# EAGLE board WaterLevel-Eagle-V1 (EAGLE 9.6.2)
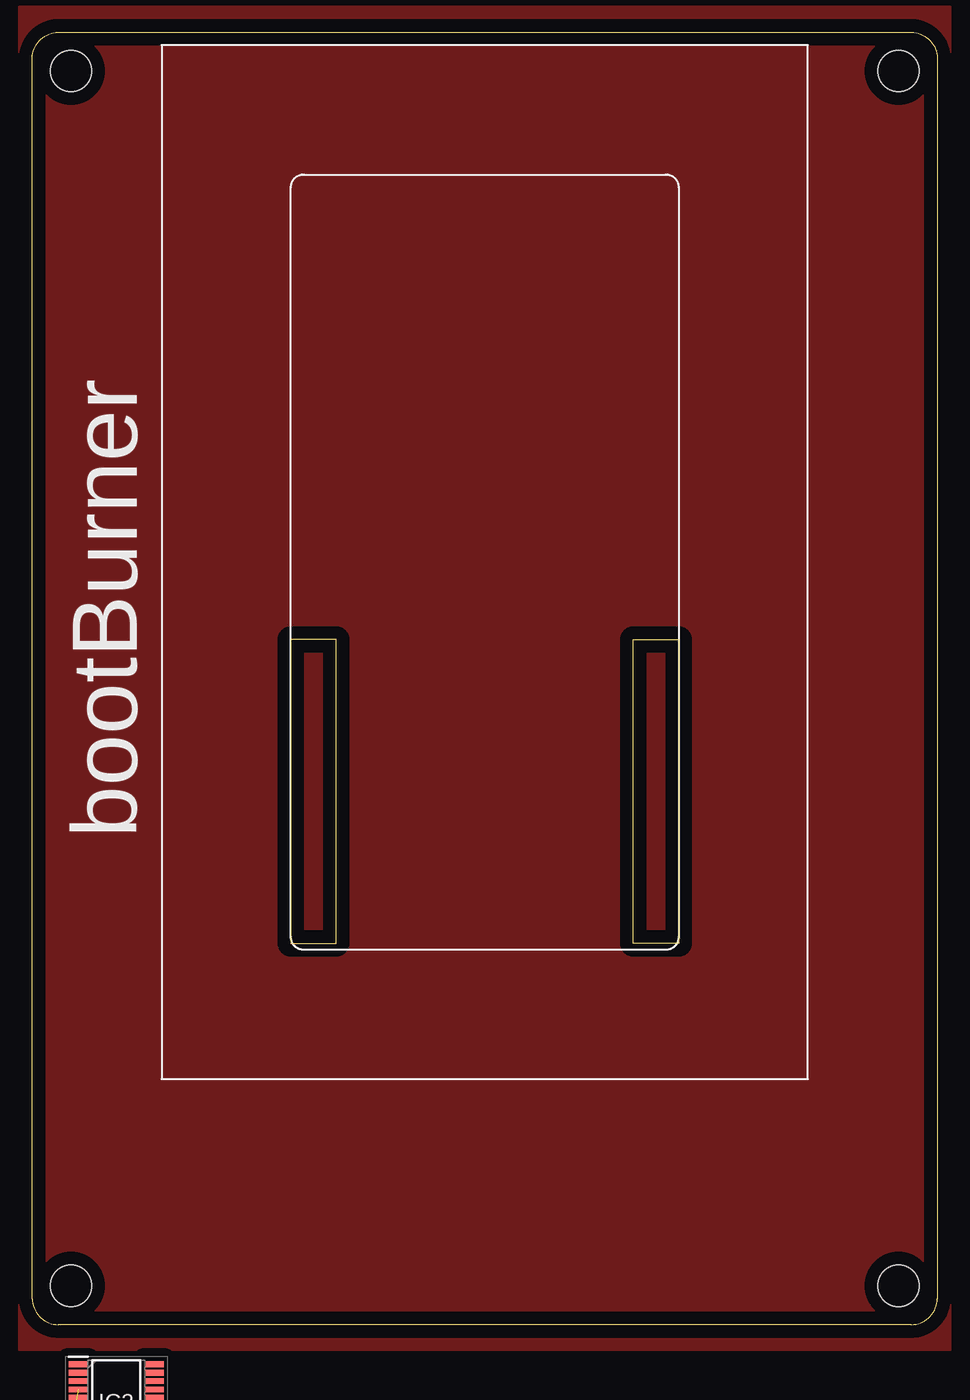
[diagram p0: board, top side]
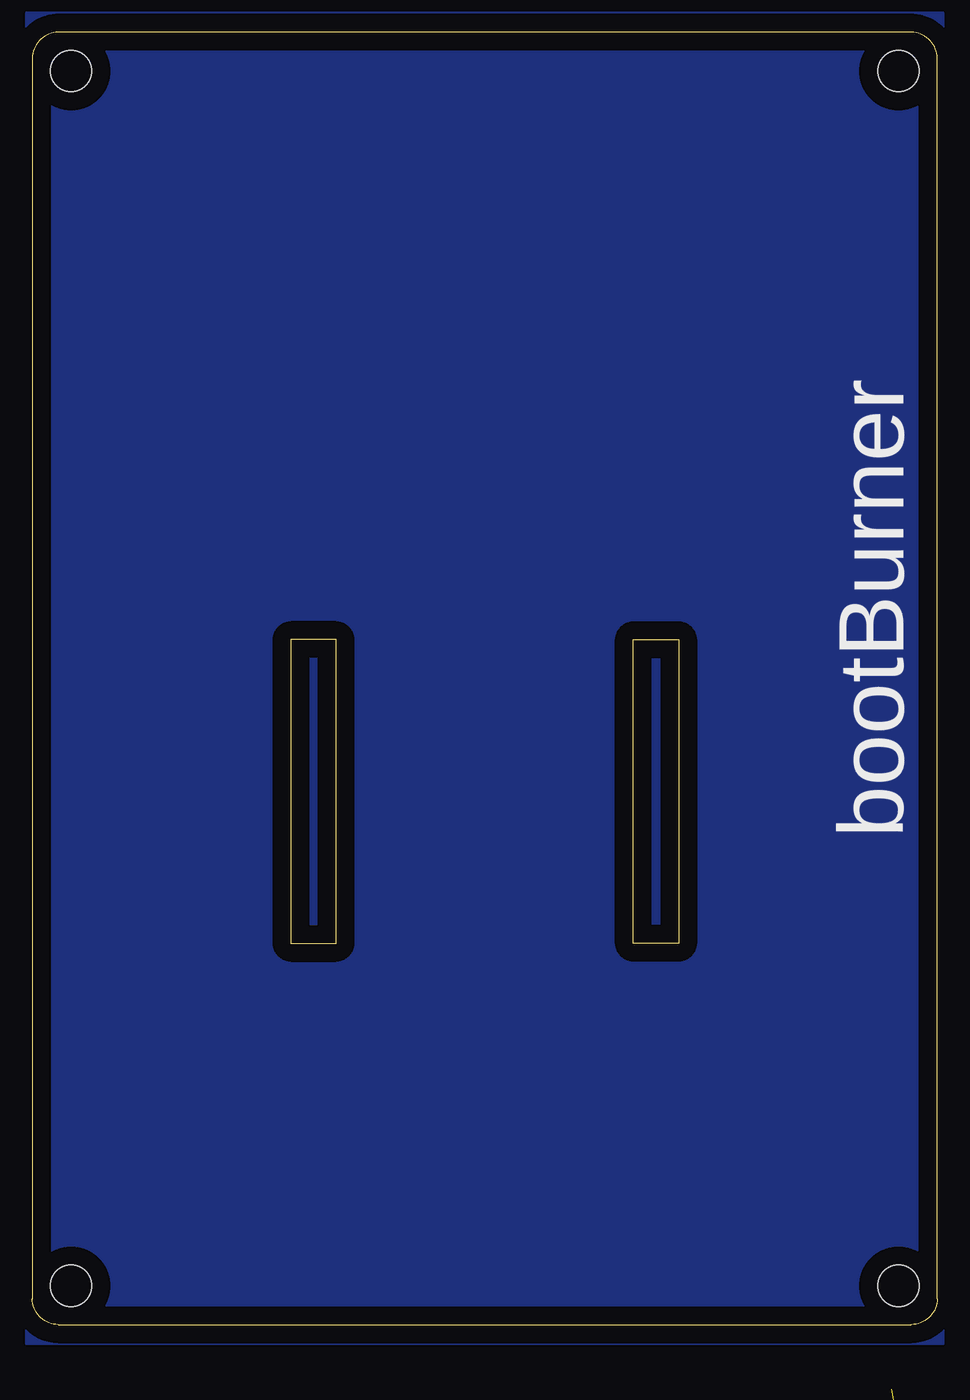
[diagram p1: board, bottom side, seen from below]

Size 70 x 100 mm. Coordinates in mm from the lower left corner, seen from the top.
Outline: 23.5,29.5 23.5,53 20,53 20,29.5 23.5,29.5
Outline: 46.5,29.5 46.5,53 50,53 50,29.5 46.5,29.5
Outline: 0,2 0,98 arc-90 2,100 68,100 arc-90 70,98 70,2 arc-90 68,0 2,0 arc-90 0,2
Copper layers (1*16): Top 0.035mm / dielectric 1.5mm / Bottom 0.035mm
Design rules "default": minimum track width 6mil, minimum drill 0.35mm, track to track 6mil, track to pad 6mil, pad to pad 6mil, via to via 6mil, smd to smd 6mil, copper to edge 40mil, drill to drill 6mil, minimum pad ring 10mil, minimum via ring 8mil, stop-mask expansion 4mil, vias tented up to drill 0mil, thermal gap 10mil
Holes 3.2 mm at 67,97 3,97 3,3 67,3

## Footprints (pad centres in the part's own frame; a part is rotated, then mirrored left to right if it is on the bottom)
C0805 = smd 1.3 x 1.5: 1 -0.95,0; 2 0.95,0
SOP65P640X120-20N = smd 1.475 x 0.45: 1 -2.938,2.925; 2 -2.938,2.275; 3 -2.938,1.625; 4 -2.938,0.975; 5 -2.938,0.325; 6 -2.938,-0.325; 7 -2.938,-0.975; 8 -2.938,-1.625; 9 -2.938,-2.275; 10 -2.938,-2.925; 11 2.938,-2.925; 12 2.938,-2.275; 13 2.938,-1.625; 14 2.938,-0.975; 15 2.938,-0.325; 16 2.938,0.325; 17 2.938,0.975; 18 2.938,1.625; 19 2.938,2.275; 20 2.938,2.925
R0805 = smd 1.3 x 1.5: 1 -0.95,0; 2 0.95,0

## Placement (x,y rotation side)
C7  1uF  [C0805]  1,-11 0 top  (outside the outline)
C8  0.1uF  [C0805]  7,-11 0 top  (outside the outline)
IC2  STM8S003F3P6  [SOP65P640X120-20N]  6.5,-6 0 top  (outside the outline)
R4  10K  [R0805]  1,-13.5 0 top  (outside the outline)

## Library data of the parts
C7 C8 R4 = eventHorizon
IC2 = electroShri; ARROW_PART_NUMBER: STM8S003F3P6; ARROW_PRICE-STOCK: https://www.arrow.com/en/products/stm8s003f3p6/stmicroelectronics; DESCRIPTION: STMICROELECTRONICS - STM8S003F3P6 - MCU, 8BIT, STM8, 16MHZ, TSSOP-20; HEIGHT: 1.2mm; MANUFACTURER_NAME: STMicroelectronics; MANUFACTURER_PART_NUMBER: STM8S003F3P6; MOUSER_PART_NUMBER: 511-STM8S003F3P6; MOUSER_PRICE-STOCK: https://www.mouser.co.uk/ProductDetail/STMicroelectronics/STM8S003F3P6?qs=vV0pr1uq7fD%252BGii5YhjnYw%3D%3D

## Nets
D13: IC2.1
GND: C7.2 C8.2 IC2.7
PA1/D0: IC2.5
PA2/D1: IC2.6
PA3/SS/D2~: IC2.10
PC3/D5~: IC2.13
PC4/D6~/A0: IC2.14
PC5/D7: IC2.15
PC6/D8~: IC2.16
PC7/D9~: IC2.17
PD2/D11/A1: IC2.19
PD3/D12~/A2: IC2.20
RST: IC2.4 R4.2
RX: IC2.3
SCL: IC2.12
SDA: IC2.11
SWIM/D10: IC2.18
TX: IC2.2
VCAP: C7.1 IC2.8
VDD: C8.1 IC2.9 R4.1

## Tracks (layer width: path | path; a pad name or v marks a point on that pad's centre or on a via)
GND  (2 unrouted)
  pour Top (isolate 1.016): -1,-2 -1,102 71,102 71,-2
  pour Bottom (isolate 1.422): -0.5,-1.5 -0.5,101.5 70.5,101.5 70.5,-1.5
RST  (1 unrouted)
VCAP  (1 unrouted)
VDD  (2 unrouted)

## Text on the board
tPlace: bootBurner
bPlace: bootBurner